# Altium PCB pcb.PcbDoc
Units mm, origin at the board's own origin, x right, y up, seen from the top; angles counter-clockwise.
Board outline 100 x 70 mm, 2 copper layers (Top Layer, Bottom Layer); 59 components, 42 nets, 155 pads, 11 vias.
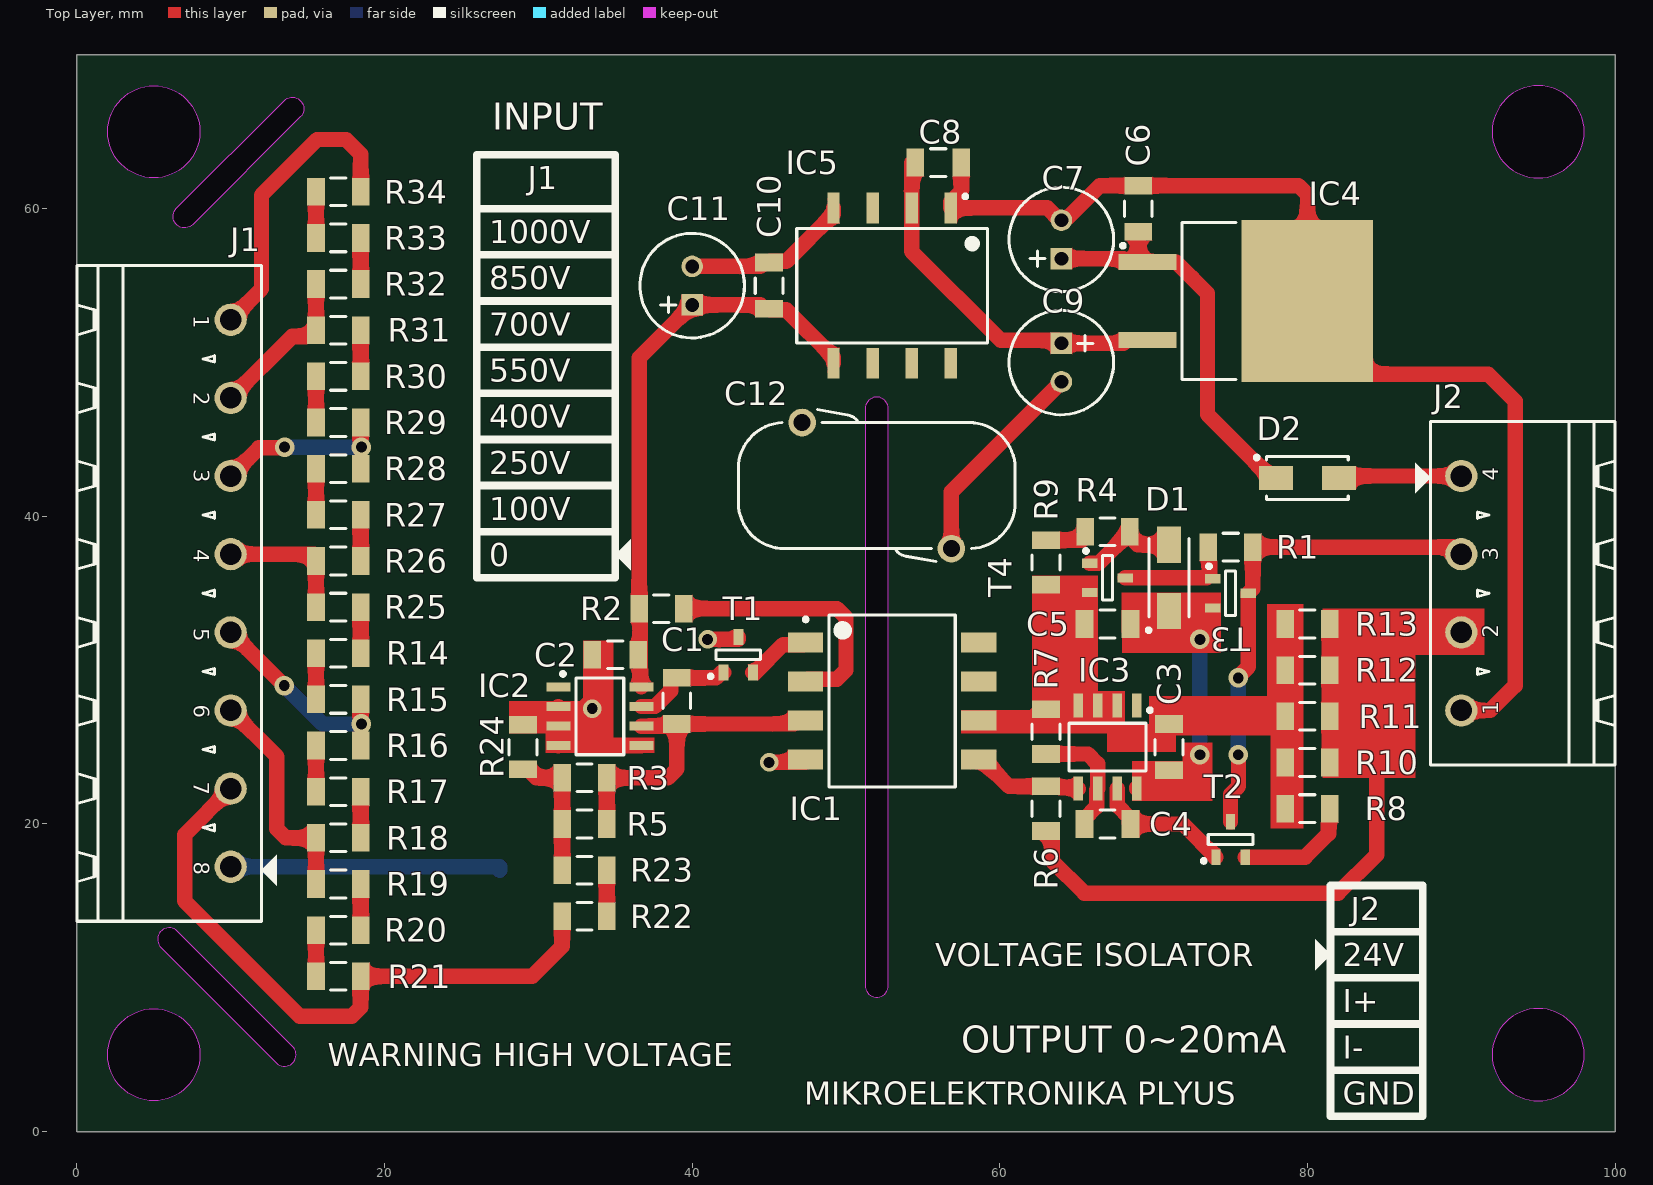
[diagram p0: Top Layer view]
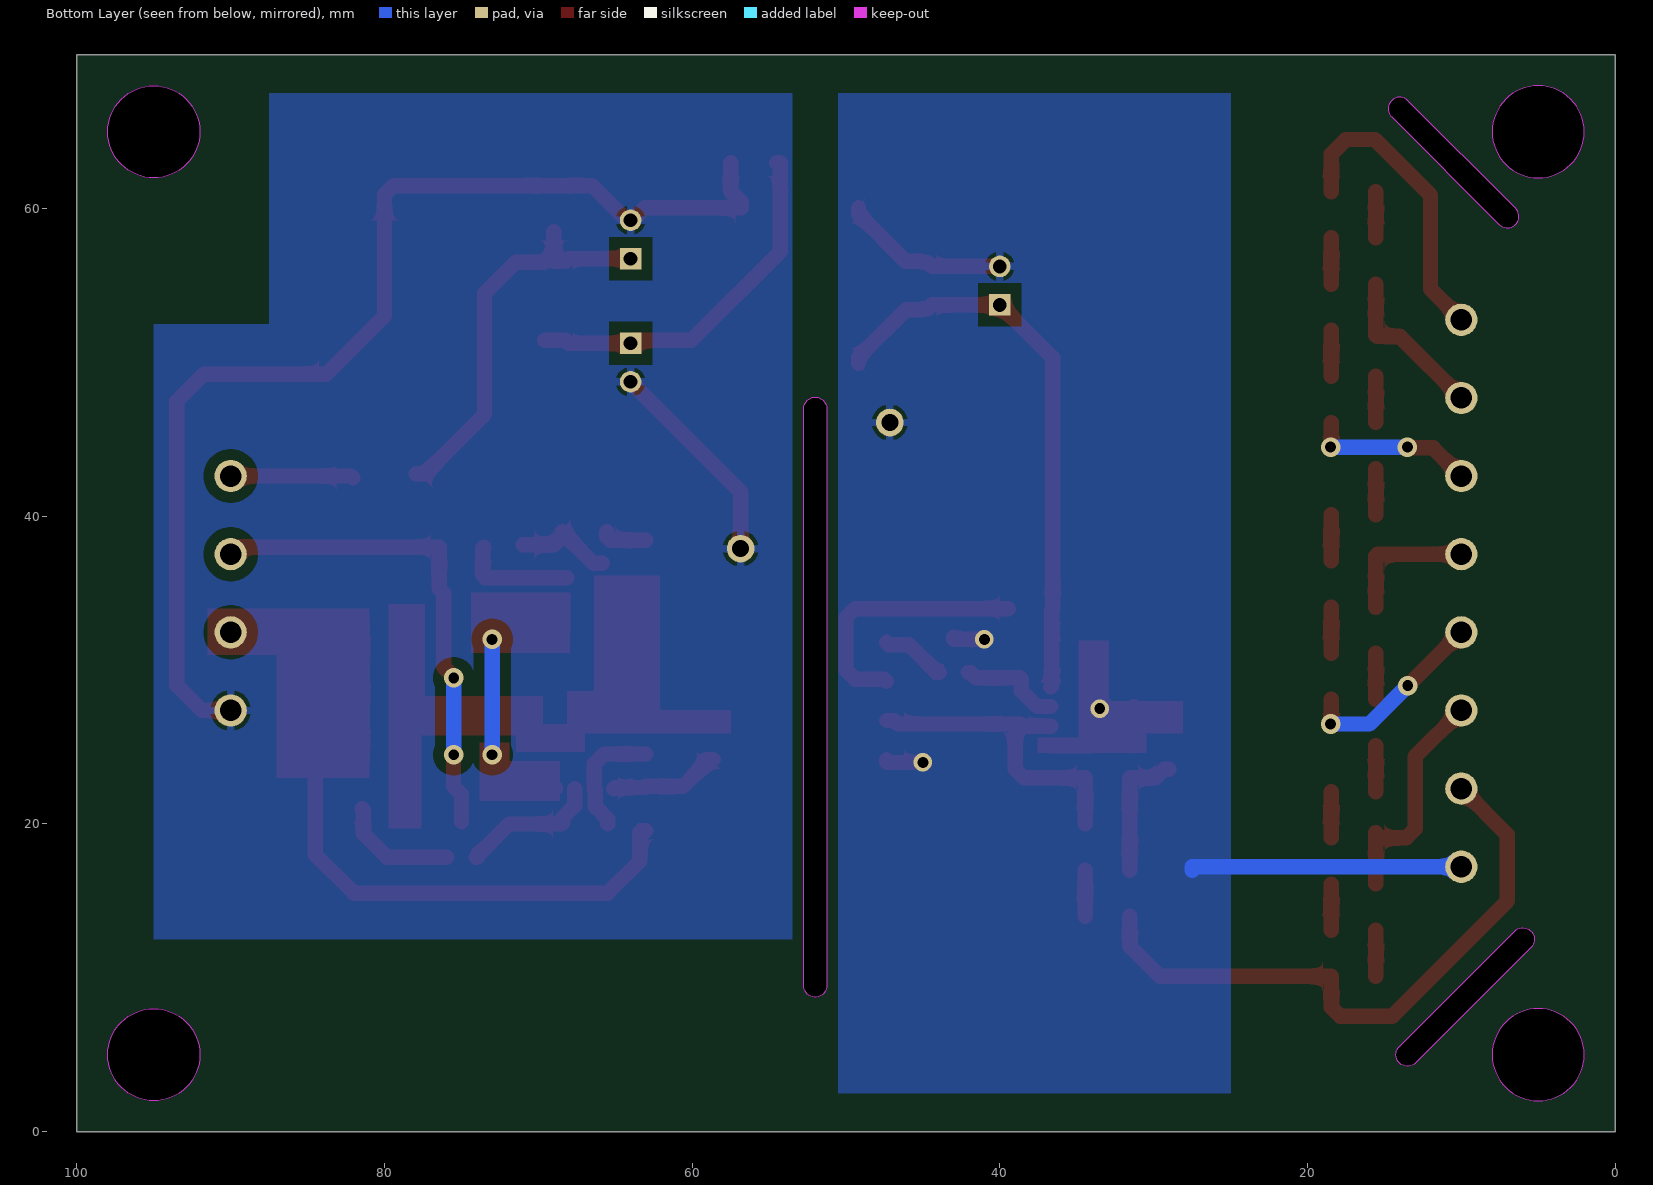
[diagram p1: Bottom Layer view, seen from below]
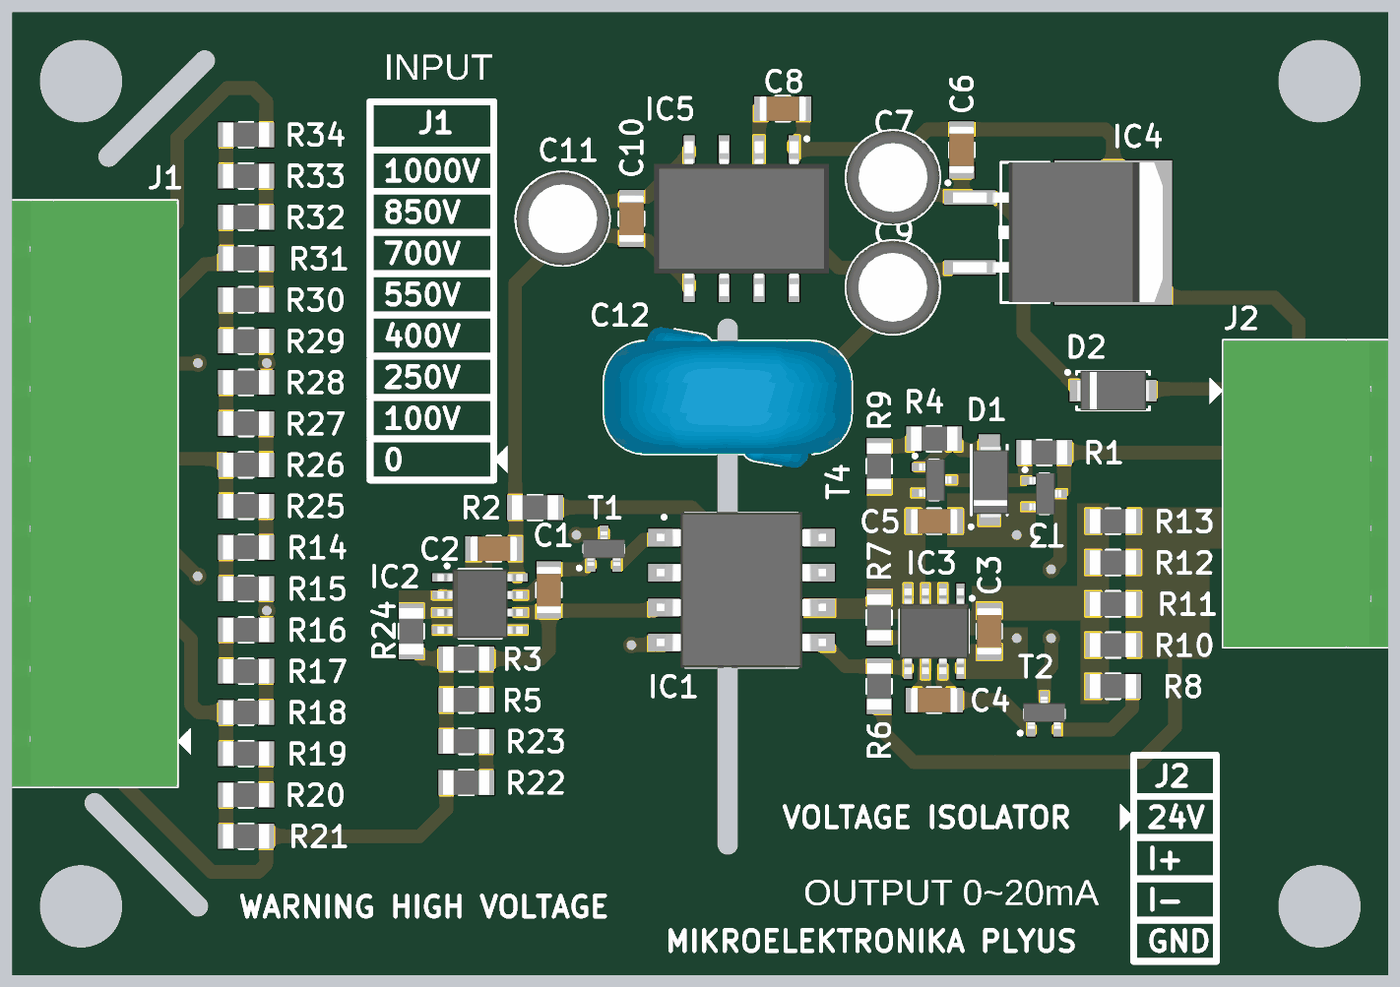
[diagram p2: 3D render of the assembled board from above, using the file's embedded part models]

## Layer stack, top to bottom
Top Solder: solder mask 0.0102, Solder Resist, Dk 3.5
Top Layer: signal copper 0.0356
Dielectric 1: dielectric 0.32, FR-4, Dk 4.8
Bottom Layer: signal copper 0.0356
Bottom Solder: solder mask 0.0102, Solder Resist, Dk 3.5

## Board outline
0,0 100,0 100,70 0,70
cut-out: 51.25,9.5 ccw(c52,9.5) 52.75,9.5 52.75,47 ccw(c52,47) 51.25,47
cut-out: 5.469,11.969 12.969,4.469 ccw(c13.5,5) 14.25,5 ccw(c13.5,5) 14.031,5.531 6.531,13.031 ccw(c6,12.5)
cut-out: 7.531,58.969 cw(c7,59.5) 6.469,60.031 13.469,67.031 cw(c14,66.5) 14.75,66.5 cw(c14,66.5) 14.531,65.969
cut-out: 92,65 ccw(c95,65) 95,62 ccw(c95,65) 98,65 ccw(c95,65) 95,68 ccw(c95,65)
cut-out: 92,5 ccw(c95,5) 95,2 ccw(c95,5) 98,5 ccw(c95,5) 95,8 ccw(c95,5)
cut-out: 5,62 cw(c5,65) 2,65 cw(c5,65) 5,68 cw(c5,65) 8,65 cw(c5,65)
cut-out: 5,2 cw(c5,5) 2,5 cw(c5,5) 5,8 cw(c5,5) 8,5 cw(c5,5)

## Design rules (kind name [scope] priority, off if disabled: settings)
BoardOutlineClearance [All] p1: gap=0.2 ignorepadtopadclearanceinfootprint=FALSE except(0.4: Arc-SplitBarrior Arc-SplitContinuation Track-SplitBarrior Track-SplitContinuation SMDPad-SplitBarrior SMDPad-SplitContinuation THPad-SplitBarrior THPad-SplitContinuation Via-SplitBarrior Via-SplitContinuation Fill-SplitBarrior Fill-SplitContinuation Poly-SplitBarrior Poly-SplitContinuation Region-SplitBarrior Region-SplitContinuation Text-SplitBarrior Text-SplitContinuation)
Clearance "Clearance Bottom Layer" [OnLayer('Bottom Layer')] p1: gap=0.7 ignorepadtopadclearanceinfootprint=TRUE except(0.203: Arc-Arc Arc-Track Arc-SMDPad Arc-THPad Arc-Via Arc-Hole Track-Track Track-SMDPad Track-THPad Track-Via Track-Hole SMDPad-SMDPad SMDPad-THPad SMDPad-Via SMDPad-Hole THPad-THPad THPad-Via THPad-Hole Via-Via Via-Hole Fill-Hole Poly-Hole Region-Hole Text-Hole; 0.254: Arc-Text Track-Text SMDPad-Text THPad-Text Via-Text Fill-Text Poly-Text Region-Text Text-Text)
Clearance "Clearance Top Layer" [OnLayer('Top Layer')] p2: gap=0.203 ignorepadtopadclearanceinfootprint=TRUE except(0.254: Arc-Text Track-Text SMDPad-Text THPad-Text Via-Text Fill-Text Poly-Text Region-Text Text-Text)
Clearance [All] p3: gap=0.2 ignorepadtopadclearanceinfootprint=FALSE except(0.089: Arc-Arc Arc-Track Arc-SMDPad Track-Track Track-SMDPad SMDPad-SMDPad; 0.127: Arc-Via Track-Via SMDPad-Via THPad-Via Via-Via; 0.254: Arc-Text Track-Text SMDPad-Text THPad-Text Via-Text Fill-Text Poly-Text Region-Text Text-Text)
HoleSize [All] p1: absolutevalues=TRUE maxlimit=6.3 minlimit=0.2 maxpercent=80.000 minpercent=20.000
MinimumAnnularRing [All] p1: minimumring=0.076
MinimumSolderMaskSliver [All] p1: minsoldermaskwidth=0.1
PolygonConnect PolygonConnect_1 [All] p1: thpad.connectstyle=Relief thpad.reliefconductorwidth=0.508 thpad.reliefentries=4 thpad.polygonreliefangle="90 Angle" thpad.airgapwidth=0.254 smdpad.connectstyle=Relief smdpad.reliefconductorwidth=0.508 smdpad.reliefentries=4 smdpad.polygonreliefangle="90 Angle" smdpad.airgapwidth=0.254 via.connectstyle=Direct via.reliefconductorwidth=0.508 via.reliefentries=4 via.polygonreliefangle="90 Angle" via.airgapwidth=0.254
RoutingCorners [All] p1: cornerstyle=Round minsetback=2.54 maxsetback=2.54
RoutingVias [All] p1: holewidth=0.5 width=1 viastyle="Through Hole" minholewidth=0.2 minwidth=0.45 maxholewidth=1 maxwidth=2
SilkToSilkClearance [All] p1: silktosilkclearance=0.1
SilkToSolderMaskClearance [IsPad] p1: minsilkscreentomaskgap=0.1 clearancetoexposedcopper=TRUE
SolderMaskExpansion [All] p1: expansion=0.102 istentingtop=FALSE
Width [All] p1: maxlimit=2.54 minlimit=0.089 preferedwidth=0.381
25 further rules are at their usual default settings.

## Components (designator, comment, footprint, x,y, rotation, side; value= is the part's Value field where it differs from the comment)
C1 "1nF" CAPC3216X140N 39,28 r90 top
C2 "100nF" CAPC3216X140N 35,31 r0 top
C3 "100nF" CAPC3216X140N 71,25 r270 top
C4 "1nF" CAPC3216X140N 67,20 r0 top
C5 "100nF" CAPC3216X140N 67,33 r0 top
C6 "100nF" CAPC3216X140N 69,60 r270 top
C7 "100uF" CAPPR250-680X1250 64,58 r90 top
C8 "100nF" CAPC3216X140N 56,63 r180 top
C9 "100uF" CAPPR250-680X1080 64,50 r270 top
C10 "100nF" CAPC3216X140N 45,55 r270 top
C11 "100uF" CAPPR250-680X1080 40,55 r90 top
C12 "1nF" CAPRB_MURATA_DHR4E4C102K2FB 52,42 r180 top
D1 "1SMA5918BT3G" DIOM5226X230N 71,36 r90 top
D2 "SS16" DIOM5127X229N 80,42.5 r0 top
IC1 "HCNR200-300E" AVAGO_HCNR200-300E 53,28 r0 top
IC2 "LM358AD" SOIC127P600X175-8N 34,27 r0 top
IC3 "LM358AD" SOIC127P600X175-8N 67,25 r270 top
IC4 "L7805ABD2T-TR" TO254P1542X460-3N-R790X1040 76,54 r0 top
IC5 "TSM 0505S" SOIC127P1110X695-8_14N 53,55 r270 top
J1 "" PHOENIX_1757307 10,35 r270 top
J2 "" PHOENIX_1757268 90,35 r90 top
R1 "100k" RESC3216X65N 75,38 r0 top
R2 "150" RESC3216X65N 38,34 r180 top
R3 "160k" RESC3216X65N 33,23 r0 top
R4 "1k6" RESC3216X65N 67,39 r0 top
R5 "160k" RESC3216X65N 33,20 r0 top
R6 "10k" RESC3216X65N 63,21 r90 top
R7 "10k" RESC3216X65N 63,26 r270 top
R8 "150" RESC3216X65N 80,21 r0 top
R9 "1k6" RESC3216X65N 63,37 r90 top
R10 "100" RESC3216X65N 80,24 r180 top
R11 "100" RESC3216X65N 80,27 r180 top
R12 "100" RESC3216X65N 80,30 r180 top
R13 "100" RESC3216X65N 80,33 r180 top
R14 "100k" RESC3216X65N 17,31.1 r0 top
R15 "100k" RESC3216X65N 17,28.1 r180 top
R16 "100k" RESC3216X65N 17,25.1 r0 top
R17 "100k" RESC3216X65N 17,22.1 r180 top
R18 "100k" RESC3216X65N 17,19.1 r0 top
R19 "100k" RESC3216X65N 17,16.1 r180 top
R20 "100k" RESC3216X65N 17,13.1 r0 top
R21 "100k" RESC3216X65N 17,10.1 r180 top
R22 "100k" RESC3216X65N 33,14 r180 top
R23 "100k" RESC3216X65N 33,17 r0 top
R24 "8k2" RESC3216X65N 29,25 r270 top
R25 "100k" RESC3216X65N 17,34.1 r0 top
R26 "100k" RESC3216X65N 17,37.1 r180 top
R27 "100k" RESC3216X65N 17,40.1 r0 top
R28 "100k" RESC3216X65N 17,43.1 r180 top
R29 "100k" RESC3216X65N 17,46.1 r0 top
R30 "100k" RESC3216X65N 17,49.1 r180 top
R31 "100k" RESC3216X65N 17,52.1 r0 top
R32 "100k" RESC3216X65N 17,55.1 r180 top
R33 "100k" RESC3216X65N 17,58.1 r0 top
R34 "100k" RESC3216X65N 17,61.1 r180 top
T1 "MMBT3906LT1G" SOT95P240X110-3N 43,31 r90 top
T2 "MMBT3904" SOT95P230X110-3N 75,19 r90 top
T3 "MMBT3904" SOT95P230X110-3N 75,35 r0 top
T4 "MMBT3904" SOT95P230X110-3N 67,36 r0 top

## Footprints (in the part's own frame and the unit in brackets; to place one, negate y for a bottom-side part, rotate by r counter-clockwise, add the part's x,y. Pads: shape width x height; smd on the part's side, far side on the other; paste and mask are expansions set on the pad)
AVAGO_HCNR200-300E [mm] "DIP Gull Wing Surface Mount, 8-Leads, Body 11.15x9mm, Pitch 2.54mm"
  rect 2.29x1.3 smd: 1(-5.635,3.81) 2(-5.635,1.27) 3(-5.635,-1.27) 4(-5.635,-3.81) 5(5.635,-3.81) 6(5.635,-1.27) 7(5.635,1.27) 8(5.635,3.81)
  silkscreen extent -5.75,-5.6 4.1,5.6, body extent -6.15,-5.65 6.15,5.65, height 4.01
CAPC3216X140N [mm] "Chip Capacitor, Body 3.2x1.6mm, IPC Medium Density"
  rect 1.15x1.8 smd: 1(-1.5,0) 2(1.5,0)
  silkscreen extent -0.5,-0.9 0.5,0.9, body extent -1.7,-0.9 1.7,0.9, height 1.4
CAPPR250-680X1080 [mm] "Capacitor, Radial, Pin spacing 2.5mm - Body Diameter 6.8mm X Body Height 10.8mm"
  rect 1.4x1.4 hole 0.9: 1(-1.25,0)
  round 1.4 hole 0.9: 2(1.25,0)
  silkscreen extent -3.4,-3.4 3.4,3.4, body extent -3.41,-3.41 3.39,3.39, height 10.8
CAPPR250-680X1250 [mm] "Capacitor, Radial, Pin spacing 2.5mm - Body Diameter 6.8mm X Body Height 12.5mm"
  rect 1.4x1.4 hole 0.9: 1(-1.25,0)
  round 1.4 hole 0.9: 2(1.25,0)
  silkscreen extent -3.4,-3.4 3.4,3.4, body extent -3.41,-3.41 3.39,3.39, height 12.5
CAPRB_MURATA_DHR4E4C102K2FB [mm] "Capacitor Radial Button, Pin spacing 12.7mm - Body Diameter  18mm X Body Width 8.2mm X Body Height 22mm"
  round 1.8 hole 1.1: 1(-4.849,4.1) 2(4.849,-4.1)
  silkscreen extent -9,-4.94 9,4.94, body extent -9,-5.1 9,5.1, height 22
DIOM5127X229N [mm] "DO-214-AC/SMA Molded Diode, 2-Leads, Body 5.1x2.7mm, IPC Medium Density"
  rect 2.2x1.55 smd: 1(-2.05,0) 2(2.05,0)
  silkscreen extent -3.42,-1.4 2.65,1.45, body extent -2.67,-1.45 2.68,1.45, height 2.29
DIOM5226X230N [mm] "DO-214-AC/SMA Diode, Molded Body; 5.195mm L X 2.605mm W X 2.30mm H, IPC Medium Density"
  rect 2.35x1.55 smd: 1(-2.15,0) 2(2.15,0)
  silkscreen extent -3.52,-1.3 2.55,1.45, body extent -2.75,-1.4 2.45,1.2, height 2.3
PHOENIX_1757268 [mm] "PHOENIX MSTBA Serie, Pitch 5.08mm, 12A, 250V, 4 Positions Header"
  round 2.1 hole 1.4: 1(-7.62,0) 2(-2.54,0) 3(2.54,0) 4(7.62,0)
  silkscreen extent -11.16,-10 11.16,2, body extent -11.16,-10 11.16,2, height 8.6
PHOENIX_1757307 [mm] "PHOENIX MSTBA Serie, Pitch 5.08mm, 12A, 250V, 8 Positions Header"
  round 2.1 hole 1.4: 1(-17.78,0) 2(-12.7,0) 3(-7.62,0) 4(-2.54,0) 5(2.54,0) 6(7.62,0) 7(12.7,0) 8(17.78,0)
  silkscreen extent -21.32,-10 21.32,2, body extent -21.32,-10 21.32,2, height 8.6
RESC3216X65N [mm] "Chip Resistor, EIA 1206, Metric 3216, Body 3.2x1.6mm, IPC Medium Density"
  rect 1.15x1.8 smd: 1(-1.45,0) 2(1.45,0)
  silkscreen extent -0.5,-0.9 0.5,0.9, body extent -1.67,-0.87 1.68,0.88, height 0.65
SOIC127P600X175-8N [mm] "SOIC 8, Pitch 1.27mm - Body 4x5mm, IPC Medium Density"
  rect 1.55x0.6 smd: 1(-2.7,1.905) 2(-2.7,0.635) 3(-2.7,-0.635) 4(-2.7,-1.905) 5(2.7,-1.905) 6(2.7,-0.635) 7(2.7,0.635) 8(2.7,1.905)
  silkscreen extent -2.52,-2.5 1.55,2.88, body extent -3.1,-2.5 3.1,2.5, height 1.75
SOIC127P1110X695-8_14N [mm] "SOIC, 1.27mm, pitch; 8 of 14 pin, 8.00mm W X 12.35mm L X 6.95mm H body, IPC Medium Density"
  rect 2x0.8 smd: 1(-5.05,3.81) 3(-5.05,1.27) 5(-5.05,-1.27) 7(-5.05,-3.81) 8(5.05,-3.81) 10(5.05,-1.27) 12(5.05,1.27) 14(5.05,3.81)
  silkscreen extent -5.92,-6.2 3.72,6.2, body extent -5.63,-6.35 5.63,6.35, height 6.95
SOT95P230X110-3N [mm] "SOT23, 3 pin, Pitch 0.95mm - 1.3mm W X 2.9mm L X 1.1mm H, IPC Medium Density"
  rect 1x0.6 smd: 1(-1.15,0.95) 2(-1.15,-0.95) 3(1.15,0)
  silkscreen extent -1.52,-1.45 0.33,1.87, body extent -1.08,-1.5 1.25,1.5, height 1.1
SOT95P240X110-3N [mm] "SOT23 3-Leads, Pitch 0.95mm, Body 1.3x2.9mm, IPC Medium Density"
  rect 1.05x0.65 smd: 1(-1.15,0.95) 2(-1.15,-0.95) 3(1.15,0)
  silkscreen extent -1.52,-1.45 0.3,1.92, body extent -1.25,-1.5 1.25,1.5, height 1.1
TO254P1542X460-3N-R790X1040 [mm] "D2PAK TO-263, TO, 2.54mm pitch; 2 pin,15.425mm L X 9.15mm W X 4.60mm H body, IPC Medium Density"
  rect 3.75x1.05 smd: 1(-6.4,2.54) 2(-6.4,-2.54)
  rect 8.55x10.5 smd: 3(4,0)
  silkscreen extent -8.12,-5.1 -0.65,5.1, body extent -7.62,-5.08 7.62,5.08, height 4.6

## Part data
C1 C4: library part CC1206_1NF_100V_5%_NP0, "Non-polarised capacitor", Case=1206, Manufacturer=GENERIC, Manufacturer1 ComponentHeight=0.94mm, Manufacturer1 Example=AVX, Manufacturer1 Part Number=12061A102JAT2A, Tolerance=±5%, Voltage=100V, Author="CERN DEM JLC", Component Type=Standard, CreateDate=06.04.2011, HelpURL=\\cern.ch\dfs\Applications\Altium\Datasheets\CC1206_NP0_AVX.pdf, LatestRevisionDate=06.04.2011, Manufacturer Part Number=CC1206_1NF_100V_5%_NP0, Mounted=Yes, Part Description="SMD Multilayer Chip Ceramic Capacitor", Part Number=CC1206_1NF_100V_5%_NP0, Pin Count=2, Sense=No, SMD=Yes, Socket=No, Status=Preferred, TC=C0G/NP0
C2 C3 C5 C6 C8 C10: library part CC1206_100NF_100V_10%_X7R, "Non-polarised capacitor", Case=1206, Manufacturer=GENERIC, Manufacturer1 ComponentHeight=1.25mm, Manufacturer1 Example=PHYCOMP, Manufacturer1 Part Number=222260115649, Tolerance=±10%, Voltage=100V, Author="CERN DEM JLC", Component Type=Standard, CreateDate=24.08.2009, HelpURL=\\cern.ch\dfs\Applications\Altium\Datasheets\CC1206_X7R_PHYCOMP.pdf, LatestRevisionDate=24.08.2009, Manufacturer Part Number=CC1206_100NF_100V_10%_X7R, Mounted=Yes, Part Description="SMD Multilayer Chip Ceramic Capacitor", Part Number=CC1206_100NF_100V_10%_X7R, Pin Count=2, Sense=No, SMD=Yes, Socket=No, Status=Preferred, TC=X7R
C7: library part CAER_100UF_25V_20%_NICHICON_UPS1E101MED, "Polarised capacitor", Case="LS2.5 D6.3 x H11", Manufacturer=NICHICON, Manufacturer Part Number=UPS1E101MED, Tolerance=±20%, Voltage=25V, Author="CERN DEM MR", Component Type=Standard, ComponentHeight=12.5mm, CreateDate=30.05.2016, HelpURL=\\cern.ch\dfs\Applications\Altium\Datasheets\CAER_NICHICON_UPS.pdf, LatestRevisionDate=30.05.2016, Mounted=Yes, Part Description="Aluminium Electrolytic Capacitor (UPS Series)", Part Number=CAER_100UF_25V_20%_NICHICON_UPS1E101MED, Pin Count=2, Sense=No, SMD=No, Socket=No, Status=None
C9 C11: library part CAER_100UF_16V_20%_CHEMI-CON_APSA160ELL101MFA5G, "Polarised capacitor", Case="LS2.5 D6.3 x H10.5", Manufacturer="UNITED CHEMI-CON", Manufacturer Part Number=APSA160ELL101MFA5G, Tolerance=±20%, Voltage=16V, Author="CERN DEM JLC", Component Type=Standard, ComponentHeight=10.8mm, CreateDate=12.01.2012, HelpURL=\\cern.ch\dfs\Applications\Altium\Datasheets\CAER_CHEMI-CON_PSA.pdf, LatestRevisionDate=12.01.2012, Mounted=Yes, Part Description="Low ESR 0R025 Conductive Polymer Aluminium Solid Capacitor", Part Number=CAER_100UF_16V_20%_CHEMI-CON_APSA160ELL101MFA5G, Pin Count=2, Sense=No, SMD=No, Socket=No, Status=None
C12: library part CCR_1NF_15KV_10%_MURATA_DHR4E4C102K2FB, "Non-polarised capacitor", Case="LS12.7 W8.2 x D18", Manufacturer=MURATA, Manufacturer Part Number=DHR4E4C102K2FB, Tolerance=±10%, Voltage=15kV, Author="CERN DEM JLC", Component Type=Standard, ComponentHeight=22mm, CreateDate=08.05.2014, HelpURL=\\cern.ch\dfs\Applications\Altium\Datasheets\CCR_MURATA_DHR4E4C102K2FB.pdf, LatestRevisionDate=08.05.2014, Mounted=Yes, Part Description="High Voltage Ceramic Capacitor", Part Number=CCR_1NF_15KV_10%_MURATA_DHR4E4C102K2FB, Pin Count=2, Sense=No, SMD=No, Socket=No, Status=None
D1: "Zener Diode", Case=DO-214AC, Manufacturer="ON SEMICONDUCTOR", Power=1.5W, Voltage=5.1V, Author="CERN DEM JLC", Bonding=No, Component Type=Standard, ComponentHeight=2.20mm, CreateDate=16.02.2012, Device=1SMA5918BT3G, HelpURL=\\cern.ch\dfs\Applications\Altium\Datasheets\1SMA5918BT3G.pdf, LatestRevisionDate=16.02.2012, Manufacturer Part Number=1SMA5918BT3G, Mounted=Yes, PackageDescription="DO-214-AC/SMA Diode, Molded Body; 5.21mm L X 2.60mm W X 2.20mm H, IPC Medium Density", Part Description="Zener Voltage Regulators", Part Number=1SMA5918BT3G, Pin Count=2, PressFit=No, Sense=No, SMD=Yes, Socket=No
D2: "Schottky Diode", Case=DO-214AC, Manufacturer="VISHAY GENERAL SEMICONDUCTOR", Power=1A, Voltage=60V, Author="CERN DEM JLC", Bonding=No, Component Type=Standard, ComponentHeight=2.29mm, CreateDate=15.07.2008, Device=SS16, HelpURL=\\cern.ch\dfs\Applications\Altium\Datasheets\SS16.pdf, LatestRevisionDate=23.08.2010, Manufacturer Part Number=SS16, Mounted=Yes, PackageDescription="DO-214-AC Molded Diode, Body 5.1x2.7mm, IPC Medium Density", Part Description="Surface Mount Schottky Barrier Rectifier", Part Number=SS16, Pin Count=2, PressFit=No, Sense=No, SMD=Yes, Socket=No
IC1: "High-Linearity Analog Optocoupler", Case=SOIC8, Manufacturer="AVAGO TECHNOLOGIES", Author="CERN DEM JLC", Bonding=No, Component Type=Standard, ComponentHeight=3.3mm, CreateDate=05.07.2011, Device=HCNR200-300E, HelpURL=\\cern.ch\dfs\Applications\Altium\Datasheets\HCNR200-300E.pdf, LatestRevisionDate=05.07.2011, Manufacturer Part Number=HCNR200-300E, Mounted=Yes, PackageDescription="DIP8 Gull Wing Surface Mount, 8-Leads, Body 11.15x9mm, Pitch 2.54mm", Part Description="High-Linearity Analog Optocoupler", Part Number=HCNR200-300E, Pin Count=8, PressFit=No, Sense=No, SMD=Yes, Socket=No
IC2 IC3: "Dual Operational Amplifier", Case=SOIC8, Manufacturer="TEXAS INSTRUMENTS", Author="CERN DEM JLC", Bonding=No, Component Type=Standard, ComponentHeight=1.75mm, CreateDate=02.12.2008, Device=LM358AD, HelpURL=\\cern.ch\dfs\Applications\Altium\Datasheets\LM358AD.pdf, LatestRevisionDate=13.04.2010, Manufacturer Part Number=LM358AD, Mounted=Yes, PackageDescription="SOIC 8, Pitch 1.27mm - Body 4x5mm, IPC Medium Density", Part Description="Dual Operational Amplifier", Part Number=LM358AD, Pin Count=8, PressFit=No, Sense=No, SMD=Yes, Socket=No
IC4: "3-Terminal Regulator 1=IN 2=OUT 3=GND", Case=TO-263, Manufacturer="ST MICROELECTRONICS", Author="CERN DEM JLC", Bonding=No, Component Type=Standard, ComponentHeight=4.6mm, CreateDate=13.12.2011, Device=L7805ABD2T-TR, HelpURL=\\cern.ch\dfs\Applications\Altium\Datasheets\L7805ABD2T-TR.pdf, LatestRevisionDate=13.12.2011, Manufacturer Part Number=L7805ABD2T-TR, Mounted=Yes, PackageDescription="D2PAK TO-263, TO, 2.54mm pitch; 2 pin,15.425mm L X 9.15mm W X 4.60mm H body, IPC Medium Density", Part Description="5V 1.5A Positive Voltage Regulator", Part Number=L7805ABD2T-TR, Pin Count=3, PressFit=No, Sense=No, SMD=Yes, Socket=No
IC5: "TRACO, TSM Serie, Single Output DCDC Converter", Manufacturer="TRACO POWER", Author="CERN DEM JLC", Bonding=No, Component Type=Standard, ComponentHeight=6.95mm, CreateDate=10.05.2010, Device="TSM 0505S", HelpURL="\\cern.ch\dfs\Applications\Altium\Datasheets\TSM 0505S.pdf", LatestRevisionDate=10.05.2010, Manufacturer Part Number="TSM 0505S", Mounted=Yes, PackageDescription="SOIC, 1.27mm, pitch; 8 of 14 pin, 8.00mm W X 12.35mm L X 6.95mm H body, IPC Medium Density", Part Description="5V ±10% to 5V, Iout (max) 200mA, 1W DC-DC Converter", Part Number="TSM 0505S", Pin Count=4, PressFit=No, Sense=No, SMD=Yes, Socket=No
J1: library part PHOENIX_1757307, "Connector 8 Male", Manufacturer="PHOENIX CONTACT", Manufacturer Part Number="1757307 (MSTBA 2,5/ 8-G-5,08)", Author="CERN DEM JLC", Component Type=Standard, ComponentHeight=8.6mm, CreateDate=10.02.2010, HelpURL=\\cern.ch\dfs\Applications\Altium\Datasheets\PHOENIX_1757307.pdf, LatestRevisionDate=26.04.2010, Mounted=Yes, Part Description="12A, 250V, Pitch 5.08mm, 8 Positions Header", Part Number=PHOENIX_1757307, Pin Count=8, PressFit=No, Sense=No, SMD=No, Socket=No, Status=None
J2: library part PHOENIX_1757268, "Connector 4 Male", Manufacturer="PHOENIX CONTACT", Manufacturer Part Number="1757268 (MSTBA 2,5/ 4-G-5,08)", Author="CERN DEM JLC", Component Type=Standard, ComponentHeight=8.6mm, CreateDate=10.02.2010, HelpURL=\\cern.ch\dfs\Applications\Altium\Datasheets\PHOENIX_1757268.pdf, LatestRevisionDate=26.04.2010, Mounted=Yes, Part Description="12A, 250V, Pitch 5.08mm, 4 Positions Header", Part Number=PHOENIX_1757268, Pin Count=4, PressFit=No, Sense=No, SMD=No, Socket=No, Status=None
R1 R14 R15 R16 R17 R18 R19 R20 R21 R22 R23 R25 R26 R27 R28 R29 R30 R31 R32 R33 R34: library part R1206_100K_1%_0.25W_100PPM, "Resistor - 1%", Case=1206, Manufacturer=GENERIC, Manufacturer1 ComponentHeight=0.65mm, Manufacturer1 Example="NIC COMPONENT", Manufacturer1 Part Number=NRC12F1003TRF, Power=0.25W, Tolerance=±1%, Author="CERN DEM JLC", Component Type=Standard, CreateDate=03.12.2007, HelpURL=\\cern.ch\dfs\Applications\Altium\Datasheets\R1206_NIC_NRC.pdf, LatestRevisionDate=13.03.2008, Manufacturer Part Number=R1206_100K_1%_0.25W_100PPM, Mounted=Yes, Part Description="General Purpose Thick Film Chip Resistor", Part Number=R1206_100K_1%_0.25W_100PPM, Pin Count=2, PressFit=No, Sense=No, SMD=Yes, Socket=No, Status=Preferred, TC=±100ppm/°C
R2 R8: library part R1206_150R_1%_0.25W_100PPM, "Resistor - 1%", Case=1206, Manufacturer=GENERIC, Manufacturer1 ComponentHeight=0.65mm, Manufacturer1 Example="NIC COMPONENT", Manufacturer1 Part Number=NRC12F1500TRF, Power=0.25W, Tolerance=±1%, Author="CERN DEM JLC", Component Type=Standard, CreateDate=03.12.2007, HelpURL=\\cern.ch\dfs\Applications\Altium\Datasheets\R1206_NIC_NRC.pdf, LatestRevisionDate=13.03.2008, Manufacturer Part Number=R1206_150R_1%_0.25W_100PPM, Mounted=Yes, Part Description="General Purpose Thick Film Chip Resistor", Part Number=R1206_150R_1%_0.25W_100PPM, Pin Count=2, PressFit=No, Sense=No, SMD=Yes, Socket=No, Status=Preferred, TC=±100ppm/°C
R3 R5: library part R1206_160K_1%_0.25W_100PPM, "Resistor - 1%", Case=1206, Manufacturer=GENERIC, Manufacturer1 ComponentHeight=0.65mm, Manufacturer1 Example="NIC COMPONENT", Manufacturer1 Part Number=NRC12F1603TRF, Power=0.25W, Tolerance=±1%, Author="CERN DEM JLC", Component Type=Standard, CreateDate=03.12.2007, HelpURL=\\cern.ch\dfs\Applications\Altium\Datasheets\R1206_NIC_NRC.pdf, LatestRevisionDate=13.03.2008, Manufacturer Part Number=R1206_160K_1%_0.25W_100PPM, Mounted=Yes, Part Description="General Purpose Thick Film Chip Resistor", Part Number=R1206_160K_1%_0.25W_100PPM, Pin Count=2, PressFit=No, Sense=No, SMD=Yes, Socket=No, Status=Preferred, TC=±100ppm/°C
R4 R9: library part R1206_1K6_1%_0.25W_100PPM, "Resistor - 1%", Case=1206, Manufacturer=GENERIC, Manufacturer1 ComponentHeight=0.65mm, Manufacturer1 Example="NIC COMPONENT", Manufacturer1 Part Number=NRC12F1601TRF, Power=0.25W, Tolerance=±1%, Author="CERN DEM JLC", Component Type=Standard, CreateDate=03.12.2007, HelpURL=\\cern.ch\dfs\Applications\Altium\Datasheets\R1206_NIC_NRC.pdf, LatestRevisionDate=13.03.2008, Manufacturer Part Number=R1206_1K6_1%_0.25W_100PPM, Mounted=Yes, Part Description="General Purpose Thick Film Chip Resistor", Part Number=R1206_1K6_1%_0.25W_100PPM, Pin Count=2, PressFit=No, Sense=No, SMD=Yes, Socket=No, Status=Preferred, TC=±100ppm/°C
R6 R7: library part R1206_10K_1%_0.25W_100PPM, "Resistor - 1%", Case=1206, Manufacturer=GENERIC, Manufacturer1 ComponentHeight=0.65mm, Manufacturer1 Example="NIC COMPONENT", Manufacturer1 Part Number=NRC12F1002TRF, Power=0.25W, Tolerance=±1%, Author="CERN DEM JLC", Component Type=Standard, CreateDate=03.12.2007, HelpURL=\\cern.ch\dfs\Applications\Altium\Datasheets\R1206_NIC_NRC.pdf, LatestRevisionDate=13.03.2008, Manufacturer Part Number=R1206_10K_1%_0.25W_100PPM, Mounted=Yes, Part Description="General Purpose Thick Film Chip Resistor", Part Number=R1206_10K_1%_0.25W_100PPM, Pin Count=2, PressFit=No, Sense=No, SMD=Yes, Socket=No, Status=Preferred, TC=±100ppm/°C
R10 R11 R12 R13: library part R1206_100R_1%_0.25W_100PPM, "Resistor - 1%", Case=1206, Manufacturer=GENERIC, Manufacturer1 ComponentHeight=0.65mm, Manufacturer1 Example="NIC COMPONENT", Manufacturer1 Part Number=NRC12F4700TRF, Power=0.25W, Tolerance=±1%, Author="CERN DEM JLC", Component Type=Standard, CreateDate=03.12.2007, HelpURL=\\cern.ch\dfs\Applications\Altium\Datasheets\R1206_NIC_NRC.pdf, LatestRevisionDate=13.03.2008, Manufacturer Part Number=R1206_100R_1%_0.25W_100PPM, Mounted=Yes, Part Description="General Purpose Thick Film Chip Resistor", Part Number=R1206_100R_1%_0.25W_100PPM, Pin Count=2, PressFit=No, Sense=No, SMD=Yes, Socket=No, Status=Preferred, TC=±100ppm/°C
R24: library part R1206_8K2_1%_0.25W_100PPM, "Resistor - 1%", Case=1206, Manufacturer=GENERIC, Manufacturer1 ComponentHeight=0.65mm, Manufacturer1 Example="NIC COMPONENT", Manufacturer1 Part Number=NRC12F8201TRF, Power=0.25W, Tolerance=±1%, Author="CERN DEM JLC", Component Type=Standard, CreateDate=03.12.2007, HelpURL=\\cern.ch\dfs\Applications\Altium\Datasheets\R1206_NIC_NRC.pdf, LatestRevisionDate=13.03.2008, Manufacturer Part Number=R1206_8K2_1%_0.25W_100PPM, Mounted=Yes, Part Description="General Purpose Thick Film Chip Resistor", Part Number=R1206_8K2_1%_0.25W_100PPM, Pin Count=2, PressFit=No, Sense=No, SMD=Yes, Socket=No, Status=Preferred, TC=±100ppm/°C
T1: "PNP Transistor", Case=SOT23-3, Manufacturer="ON SEMICONDUCTOR", Author="CERN DEM JLC", Bonding=No, Component Type=Standard, ComponentHeight=1.1mm, CreateDate=29.03.2012, Device=MMBT3906LT1G, HelpURL=\\cern.ch\dfs\Applications\Altium\Datasheets\MMBT3906LT1G.pdf, LatestRevisionDate=29.03.2012, Manufacturer Part Number=MMBT3906LT1G, Mounted=Yes, PackageDescription="SOT23 3-Leads, Pitch 0.95mm - Body 1.4x3mm, IPC Medium Density", Part Description="40V 200mA PNP General Purpose Transistor", Part Number=MMBT3906LT1G, Pin Count=3, PressFit=No, Sense=No, SMD=Yes, Socket=No
T2 T3 T4: "NPN Transistor", Case=SOT23-3, Manufacturer="NXP SEMICONDUCTORS", Author="CERN DEM JLC", Bonding=No, Component Type=Standard, ComponentHeight=1.1mm, CreateDate=10.02.2010, Device=MMBT3904, HelpURL=\\cern.ch\dfs\Applications\Altium\Datasheets\MMBT3904.pdf, LatestRevisionDate=10.02.2010, Manufacturer Part Number=MMBT3904, Mounted=Yes, PackageDescription="SOT23, 3 pin, Pitch 0.95mm - 1.3mm W X 2.9mm L X 1.1mm H, IPC Medium Density", Part Description="40V 200mA NPN Switching Transistor", Part Number=MMBT3904, Pin Count=3, PressFit=No, Sense=No, SMD=Yes, Socket=No

## Via types
v1: diameter 1.27, hole 0.711, Top Layer to Bottom Layer, 8 vias
v2: diameter 1.2, hole 0.7, Top Layer to Bottom Layer, 3 vias

## Nets (pads, with @x,y where several pads share a name; then routed paths per layer and width w, separated by ;. In a path a pad name is that pad's centre, name@x,y a point inside that pad or via, vN(x,y) a via of type N, cw(c..) or ccw(c..) an arc to the next point about the centre after c; other vN are vias at no path point)
+5: C2.2 C10.2 C11.1 IC2.8 IC5.8 R2.2 | length 37.3
  Top Layer w1: IC2.8 36.625,28.98 36.625,33.925 R2.2 36.55,50.3 C11.1 44.425,53.75 44.675,53.5 C10.2 45.075,53.425 46.115,53.425 49.19,50.35 IC5.8
+15V: D2.2 J2.4 | length 8
  Top Layer w1: D2.2 82.17,42.62 J2.4
-15V: C6.1 C7.2 C8.1 C9.2 C12.1 IC4.3 IC5.1 J2.1 | length 88.1
  Top Layer w1: C12.1 56.849,41.599 C9.2 ; C8.1 57.5,61.136 56.914,60.55 56.91,60.55 56.81,60.45 IC5.1 63.092,60.05 63.892,59.25 C7.2 64.108,59.25 64.308,59.45 64.45,59.45 66.5,61.5 C6.1 79.414,61.5 80,60.914 IC4.3 80,53.025 83.775,49.25 91.75,49.25 93.5,47.5 93.5,29 91.88,27.38 J2.1
GND: C2.1 C10.1 C11.2 C12.2 IC1.4 IC2.2 IC2.3 IC2.4 IC2.5 IC5.7 J1.8 R24.1 T1.3 | length 49.6
  Top Layer w1: R24.1 29.042,26.408 31.257,26.408 IC2.3 ; IC2.4 IC2.3 ; C2.1 v2@33.5,28.086 ; IC2.5 34.095,25.095 33.5,25.69 v2@33.5,28.086 ; C11.2 44.425,56.25 44.675,56.5 C10.1 45.075,56.575 46.115,56.575 49.19,59.65 IC5.7 ; v2(41,32) 43,32 T1.3 ; v2(45,24) 47.365,24 IC1.4 ; IC2.3 IC2.2 31.435,27.5 32.914,27.5 v2@33.5,28.086
  Bottom Layer w1: J1.8 27.5,17.22 27.5,17
  other v2: 33.5,27.5
NetC1_1: C1.1 IC1.3 IC2.6 R3.2 R5.2 | length 21.5
  Top Layer w1: R5.2 R3.2 38.414,23 39,23.586 C1.1 ; IC2.6 38.54,26.365 38.675,26.5 C1.1 ; IC1.3 46.87,26.73 46.64,26.5 C1.1
NetC1_2: C1.2 IC2.7 T1.1 | length 6.7
  Top Layer w1: IC2.7 37.58,27.635 38.6,28.655 38.6,29.425 38.675,29.5 41.55,29.5 41.9,29.85 T1.1
NetC3_1: C3.1 C5.1 IC1.6 IC3.2 IC3.3 IC3.4 R7.1 R8.1 R9.1 R10.2 R11.2 R12.2 R13.2 T4.2 | length 46.3
  Top Layer w1: IC1.6 61.955,26.73 62.675,27.45 R7.1 65.5,27.45 ; R9.1 65.35,35.55 T4.2 65.575,34.775 65.575,33.075 C5.1 65.5,27.45 ; IC3.2 IC3.2@67.635,27.65 ; R8.1 R10.2 R11.2@78.55,26.675 ; R13.2 R12.2 R11.2 R11.2@78.55,26.675 ; 65.5,27.45 67.435,27.45 IC3.2@67.635,27.65 ; IC3.2@67.635,27.65 67.635,25.5 70.925,25.5 70.925,26.425 C3.1 78.375,26.5 R11.2@78.55,26.675
NetC3_2: C3.2 C5.2 D1.1 IC3.8 T3.2 | length 21.7
  Top Layer w1: C5.2 70.55,33 D1.1@71,33.45 ; IC3.8 68.905,22.375 69.955,23.425 70.925,23.425 C3.2 73,23.5 v1(73,24.5) ; v1(73,32) 72.948,32.052 72.398,32.052 D1.1@71,33.45 ; T3.2 71.275,34.05 71,33.775 D1.1@71,33.45
  Bottom Layer w1: v1(73,24.5) v1(73,32)
NetC4_1: C4.1 IC3.6 R7.2 | length 7.9
  Top Layer w1: R7.2 65.729,24.55 66.365,23.914 IC3.6 66.298,22.233 66.298,21.123 65.5,20.325 C4.1
NetC4_2: C4.2 IC3.7 T2.1 | length 9.1
  Top Layer w1: IC3.7 67.635,21.19 68.425,20.4 68.425,20.075 C4.2 71.9,20 T2.1
NetC6_2: C6.2 C7.1 D2.1 IC4.1 | length 25.7
  Top Layer w1: C7.1 68.04,56.75 68.225,56.565 69,56.565 C6.2 ; IC4.1 69.625,56.515 71.485,56.515 72.5,55.5 73.5,54.5 73.5,46.625 77.35,42.775 D2.1@77.95,42.775
NetC8_2: C8.2 C9.1 IC4.2 IC5.3 | length 23.9
  Top Layer w1: C8.2 54.27,63 IC5.3 54.27,57.23 60.05,51.45 63.8,51.45 C9.1 68.04,51.25 68.25,51.46 IC4.2
NetD1_2: D1.2 R4.2 T4.1 | length 6.4
  Top Layer w1: T4.1 66.4,36.95 68.05,38.6 68.375,38.6 R4.2@68.45,38.675 ; R4.2 R4.2@68.45,38.675 ; D1.2 68.975,38.15 R4.2@68.45,38.675
NetIC1_1: IC1.1 T1.2 | length 4.2
  Top Layer w1: T1.2 44.1,29.85 45.91,31.66 47.215,31.66 IC1.1
NetIC1_2: IC1.2 R2.1 | length 17.1
  Top Layer w1: R2.1 49.414,34 50,33.414 50,30.006 49.414,29.42 47.515,29.42 IC1.2
NetIC1_5: IC1.5 IC3.5 R6.2 | length 7.4
  Top Layer w1: IC1.5 59.13,24.19 59.28,24.04 59.28,23.77 60.6,22.45 R6.2 63.075,22.375 65.02,22.375 IC3.5
NetJ1_1: J1.1 R34.1 | length 19.7
  Top Layer w1: J1.1 12,54.78 12,60.887 15.613,64.5 17.5,64.5 18.45,63.55 R34.1
NetJ1_2: J1.2 R31.1 R32.2 | length 10.6
  Top Layer w1: J1.2 14,51.7 15.475,51.7 15.55,51.775 R31.1 R32.2
NetJ1_3: J1.3 R28.1 R29.2 | length 10.9
  Top Layer w1: J1.3 11.828,44.448 13.448,44.448 v1(13.5,44.5) ; v1@18.45,44.5 R29.2
  Bottom Layer w1: v1(13.5,44.5) v1(18.5,44.5)
NetJ1_4: J1.4 R25.1 R26.2 | length 8.9
  Top Layer w1: J1.4 15.435,37.54 15.55,37.425 R25.1
NetJ1_5: J1.5 R15.1 R16.2 | length 12.6
  Top Layer w1: J1.5 10.01,32.46 13.47,29 v1(13.48,29) ; v1@18.45,26.5 R15.1
  Bottom Layer w1: v1(13.48,29) 15.98,26.5 v1(18.5,26.5)
NetJ1_6: J1.6 R18.1 R19.2 | length 15.1
  Top Layer w1: J1.6 13,24.38 13,19.686 13.586,19.1 R18.1 ; R19.2 R18.1@15.55,19.425
NetJ1_7: J1.7 R21.1 R22.2 | length 41.2
  Top Layer w1: J1.7 7,19.3 7,15 14.5,7.5 17.864,7.5 18.45,8.086 R21.1 29.6,10.1 31.55,12.05 R22.2
NetJ2_2: J2.2 R6.1 R10.1 R11.1 R12.1 R13.1 | length 57.4
  Top Layer w1: R6.1 63.325,19.55 63.4,19.475 63.4,17.6 65.5,15.5 82,15.5 84.5,18 84.5,32.46 J2.2 ; R10.1 R11.1 R12.1 R13.1@81.45,32.675 ; R13.1 R13.1@81.45,32.675 ; 84.5,32.6 81.525,32.6 R13.1@81.45,32.675
NetJ2_3: J2.3 R1.2 T2.3 T3.3 | length 32.2
  Top Layer w1: T2.3 75,21.927 75.516,22.443 75.516,24.484 v1(75.5,24.5) ; v1(75.5,29.5) 75.5,29.571 76.15,30.221 T3.3 76.45,35.3 R1.2 89.242,38 89.702,37.54 J2.3
  Bottom Layer w1: v1(75.5,24.5) v1(75.5,29.5)
NetR1_1: R1.1 T3.1 T4.3 | length 7.4
  Top Layer w1: T4.3 73.45,36 73.625,36.175 73.625,37.925 R1.1
NetR3_1: R3.1 R5.1 R23.1 R24.2 | length 8.8
  Top Layer w1: R24.2 29.325,23.55 29.875,23 R3.1 R5.1 R23.1
NetR4_1: R4.1 R9.2 | length 3
  Top Layer w1: R9.2 65.325,38.45 65.55,38.675 R4.1
NetR8_2: R8.2 T2.2 | length 7.7
  Top Layer w1: T2.2 79.85,17.85 81.375,19.375 81.375,20.925 R8.2
NetR14_1: R14.1 R15.2 | length 3
  Top Layer w1: R15.2 R14.1
NetR14_2: R14.2 R25.2 | length 3
  Top Layer w1: R14.2 R25.2
NetR16_1: R16.1 R17.2 | length 3
  Top Layer w1: R17.2 R16.1
NetR17_1: R17.1 R18.2 | length 3
  Top Layer w1: R18.2 R17.1
NetR19_1: R19.1 R20.2 | length 3
  Top Layer w1: R20.2 R19.1
NetR20_1: R20.1 R21.2 | length 3
  Top Layer w1: R21.2 R20.1
NetR22_1: R22.1 R23.2 | length 3
  Top Layer w1: R22.1 R23.2
NetR26_1: R26.1 R27.2 | length 3
  Top Layer w1: R26.1 R27.2
NetR27_1: R27.1 R28.2 | length 3
  Top Layer w1: R27.1 R28.2
NetR29_1: R29.1 R30.2 | length 3
  Top Layer w1: R29.1 R30.2
NetR30_1: R30.1 R31.2 | length 3
  Top Layer w1: R30.1 R31.2
NetR32_1: R32.1 R33.2 | length 3
  Top Layer w1: R32.1 R33.2
NetR33_1: R33.1 R34.2 | length 3
  Top Layer w1: R33.1 R34.2
pads on no net: IC1.7 IC1.8 IC2.1 IC3.1 IC5.5 IC5.10 IC5.12 IC5.14

## Polygon pours and split planes (outlines as drawn)
-15V on Bottom Layer "-15V_L02_P001" (solid, pour order 1): 53.5,67.5 87.5,67.5 87.5,52.5 95,52.5 95,12.5 53.5,12.5
GND on Bottom Layer "GND_L02_P000" (solid, pour order 0): 25,67.5 50.5,67.5 50.5,2.5 25,2.5

## Other copper
Top Layer:
  region net NetC3_1: 69.725,26.5 69.725,28.3 77.375,28.3 77.375,34.3 79.725,34.3 79.725,19.725 77.625,19.725 77.625,25.775 71.425,25.775 71.425,24.7 67,24.7 67,26.5
  region net NetC3_2: 68.625,24.075 68.625,21.525 73.8,21.525 73.8,24.075
  region net NetC3_2: 70.1,24.075 71.9,24.075 71.9,25.275 73.8,25.275 73.8,22.9 70.125,22.9
  region net NetC3_1: 62.1,36.125 66.375,36.125 66.375,28.625 68.125,28.625 68.125,25.9 57.5,25.9 57.5,27.4 62.1,27.4
  region net NetC3_2: 67.925,33.75 67.925,35.025 74.375,35.025 74.375,31.125 67.95,31.125
  region net GND: 28.1,25.9 30.475,25.9 30.475,24.625 37.525,24.625 37.525,25.6 34.875,25.6 34.875,31.9 32.925,31.9 32.925,27.975 28.1,27.975
  region net NetJ2_2: 81,34 81,23 87,23 87,31 91.5,31 91.5,34

## Silkscreen, mask and mechanical layers (free items; w line width, h text height)
Top Overlay:
  region: 81.5,11.5 80.5,10.5 80.5,12.5
  region: 88,42.5 87,41.5 87,43.5
  region: 35,37.5 36,38.5 36,36.5
  region: 12,17 13,18 13,16
  lines w0.5: 26,39 35,39 ; 26,42 35,42 ; 26,45 35,45 ; 26,48 35,48 ; 26,51 35,51 ; 26,54 35,54 ; 26,57 35,57 ; 81.5,4 87.5,4 ; 81.5,7 87.5,7 ; 81.5,10 87.5,10 ; 26,60 26,63.5 35,63.5 35,60 ; 26,60 35,60 ; 26,60 26,36 35,36 35,60 ; 81.5,13 81.5,16 87.5,16 87.5,13 ; 81.5,13 87.5,13 ; 81.5,13 81.5,1 87.5,1 87.5,13
  text "INPUT" at 27,64.556 h3
  text "J1" at 29.3,61.25 h1.5
  text "1000V" at 26.8,57.75 h1.5
  text "850V" at 26.8,54.75 h1.5
  text "700V" at 26.8,51.75 h1.5
  text "550V" at 26.8,48.75 h1.5
  text "400V" at 26.8,45.75 h1.5
  text "250V" at 26.8,42.75 h1.5
  text "100V" at 26.8,39.75 h1.5
  text "0" at 26.8,36.75 h1.5
  text "J2" at 82.8,13.75 h1.5
  text "VOLTAGE ISOLATOR" at 55.8,10.75 h1.5
  text "24V" at 82.3,10.75 h1.5
  text "I+" at 82.3,7.75 h1.5
  text "I-" at 82.3,4.75 h1.5
  text "OUTPUT 0~20mA" at 57.5,4.539 h3
  text "WARNING HIGH VOLTAGE" at 16.3,4.25 h1.5
  text "MIKROELEKTRONIKA PLYUS" at 47.3,1.75 h1.5
  text "GND" at 82.3,1.75 h1.5
Mechanical 7:
  circle w0.254: c95,65 r3
  circle w0.254: c95,5 r3
  circle w0.254: c5,65 r3
  circle w0.254: c5,5 r3
  lines w0.5: 0,0 100,0 100,70 0,70 0,0
  lines w1.5: 6,12.5 13.5,5 ; 7,59.5 14,66.5 ; 52,9.5 52,47

## Text inside footprints (layer, text, board x,y; h text height)
J1: Top Overlay "3" at 7.6,43.06 h1 r270; Top Overlay "2" at 7.6,48.06 h1 r270; Top Overlay "1" at 7.6,53.06 h1 r270; Top Overlay "4" at 7.6,37.86 h1 r270; Top Overlay "7" at 7.6,22.74 h1 r270; Top Overlay "6" at 7.6,27.74 h1 r270; Top Overlay "5" at 7.6,32.74 h1 r270; Top Overlay "8" at 7.6,17.54 h1 r270
J2: Top Overlay "3" at 92.4,37.1 h1 r90; Top Overlay "2" at 92.4,32.1 h1 r90; Top Overlay "1" at 92.4,27.1 h1 r90; Top Overlay "4" at 92.4,42.3 h1 r90